# Altium PCB dc_cdi_pcb_recovery.PcbDoc (part 1 of 2)
Units mm, origin at the board's own origin, x right, y up, seen from the top; angles counter-clockwise.
Board outline 152.4 x 101.6 mm, 2 copper layers (Top Layer, Bottom Layer); 123 components, 81 nets, 537 pads, 0 vias.
Unrouted connection lines stored in the file: 280.
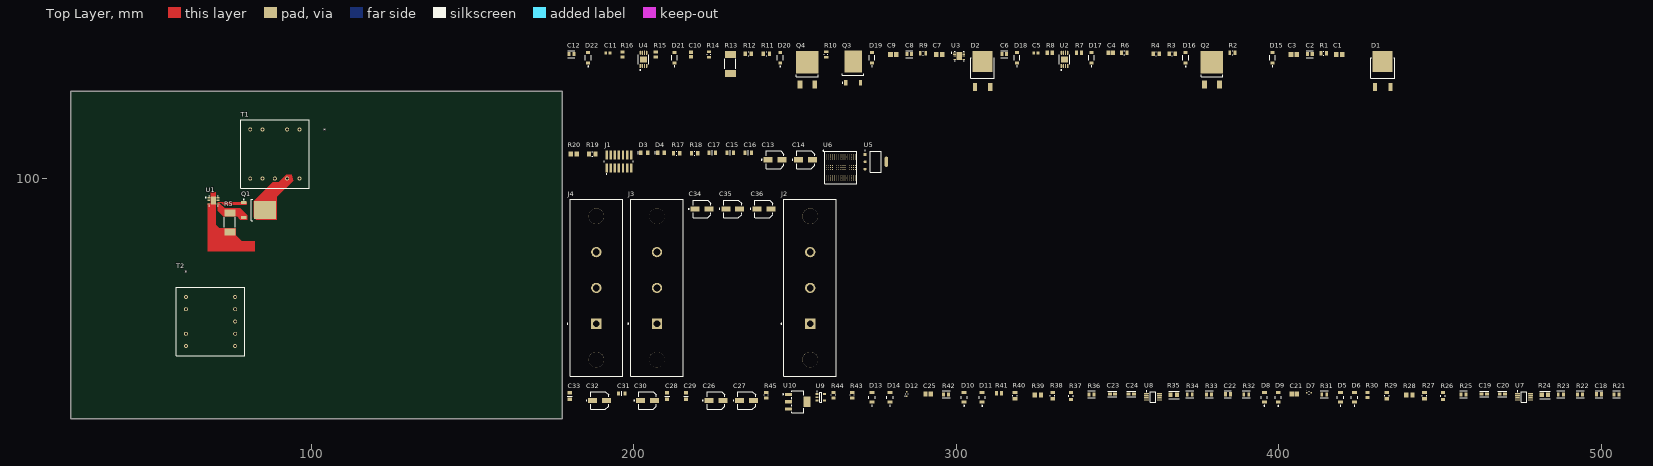
[diagram p0: Top Layer view]
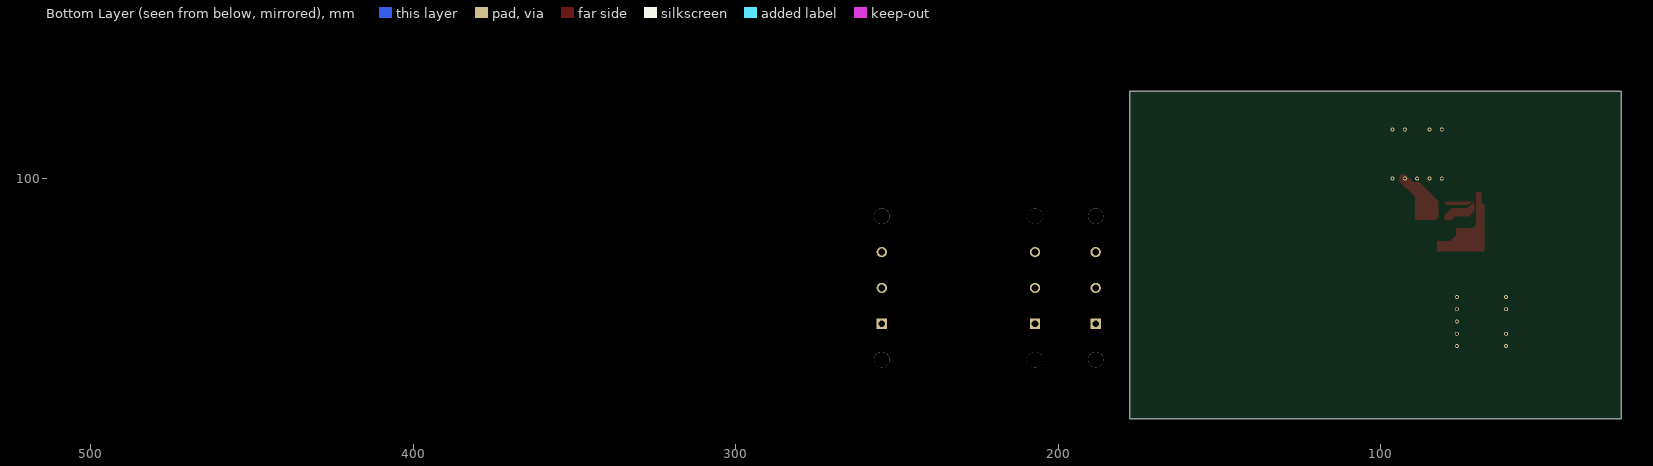
[diagram p1: Bottom Layer view, seen from below]

## Layer stack, top to bottom
Top Solder: solder mask 0.0102, Solder Resist, Dk 3.5
Top Layer: signal copper 0.0356
Dielectric 1: dielectric 0.32, FR-4, Dk 4.8
Bottom Layer: signal copper 0.0356
Bottom Solder: solder mask 0.0102, Solder Resist, Dk 3.5

## Board outline
25.4,25.4 177.8,25.4 177.8,127 25.4,127

## Design rules (kind name [scope] priority, off if disabled: settings)
Clearance Clearance_2 [InNamedPolygon('q3_1')] p1: gap=0 ignorepadtopadclearanceinfootprint=FALSE
Clearance Clearance_1 [InNamedPolygon('q3_1')] p2: gap=0 ignorepadtopadclearanceinfootprint=FALSE
Clearance [All] p3: gap=0.254 ignorepadtopadclearanceinfootprint=FALSE
PolygonConnect [All] p1: connectstyle=Relief reliefconductorwidth=0.254 reliefentries=4 polygonreliefangle="90 Angle" airgapwidth=0.254
RoutingVias [All] p1: holewidth=0.711 width=1.27 viastyle="Through Hole" minholewidth=0.711 minwidth=1.27 maxholewidth=0.711 maxwidth=1.27
SolderMaskExpansion [All] p1: expansion=0.102 istentingtop=FALSE
SupplyNets "Schematic Supply Nets_2" [InNet('GND')] p1: voltage=0.000
SupplyNets "Schematic Supply Nets_1" [InNet('+3V3')] p2: voltage=0.000
SupplyNets "Schematic Supply Nets" [InNet('+5')] p3: voltage=0.000
Width [All] p1: maxlimit=0.254 minlimit=0.254 preferedwidth=0.254
30 further rules are at their usual default settings.

## Classes and differential pairs
component class power_side: C1 C2 C3 C4 C5 C6 C7 C8 C9 C10 C11 C12 D1 D2 D15 D16 D17 D18 D19 D20 D21 D22 Q1 Q2 Q3 Q4 R1 R2 R3 R4 R5 R6 R7 R8 R9 R10 R11 R12 R13 R14 R15 R16 T1 T2 U1 U2 U3 U4
component class logic: C13 C14 C15 C16 C17 D3 D4 J1 R17 R18 R19 R20 U5 U6
component class input_output: C34 C35 C36 J2 J3 J4
component class input_filter: C18 C19 C20 C21 C22 C23 C24 C25 C26 C27 C28 C29 C30 C31 C32 C33 D5 D6 D7 D8 D9 D10 D11 D12 D13 D14 R21 R22 R23 R24 R25 R26 R27 R28 R29 R30 R31 R32 R33 R34 R35 R36 R37 R38 R39 R40 R41 R42 R43 R44 R45 U7 U8 U9 U10

## Components (designator, comment, footprint, x,y, rotation, side; value= is the part's Value field where it differs from the comment)
C1 "GRM21BR61C475KA88L" CAPC2013X135X45LL10T25 418.719,138.43 r0 top
C2 "C0805C224K1RACTU" FP-C0805C-DN-MFG 409.575,138.557 r0 top value="0.22 μF"
C3 "4.7uF 400V" CAPC2013X145X50ML20T25 404.622,138.43 r0 top
C4 "C0805C105K3RACTU" CAPC2013X140X50LL20T25 347.853,138.938 r0 top
C5 "GRM1885C1H101JA01D" CAPC1608X90X35NL10T15 324.612,138.938 r0 top
C6 "C0805C103K2RACTU" FP-C0805C-DN-MFG 314.833,138.557 r0 top value="10,000 pF"
C7 "GRM21BR61C475KA88L" CAPC2013X135X45LL10T25 294.64,138.43 r0 top
C8 "C0805C224K1RACTU" FP-C0805C-DN-MFG 285.369,138.557 r0 top value="0.22 μF"
C9 "4.7uF 400V" CAPC2013X145X50ML20T25 280.416,138.43 r0 top
C10 "C0805C105K3RACTU" CAPC2013X140X50LL20T25 217.678,138.43 r90 top
C11 "GRM1885C1H101JA01D" CAPC1608X90X35NL10T15 191.897,138.938 r0 top
C12 "C0805C103K2RACTU" FP-C0805C-DN-MFG 180.594,138.557 r0 top value="10,000 pF"
C13 "EEE1VA100SR" FP-SC-MFG 243.713,105.791 r0 top
C14 "EEE1VA100SR" FP-SC-MFG 253.238,105.791 r0 top
C15 "08055G104ZAT2A" FP-0805-L_2_01_0_2-W_1_25-MFG 229.87,107.95 r0 top
C16 "08055G104ZAT2A" FP-0805-L_2_01_0_2-W_1_25-MFG 235.458,107.95 r0 top
C17 "08055G104ZAT2A" FP-0805-L_2_01_0_2-W_1_25-MFG 224.282,107.95 r0 top
C18 "C0805C822G2GACTU" FP-C0805C-DN-MFG 499.237,33.02 r0 top value="8,200 pF"
C19 "GRM188R60J106ME47D" FP-GRM188-0_1-e0_2_0_55-IPC_A 463.677,33.147 r0 top
C20 "GRM188R60J106ME47D" FP-GRM188-0_1-e0_2_0_55-IPC_A 469.265,33.147 r0 top
C21 "08051A220J4T2A" CAPC2013X140X50NL20T25 404.749,33.147 r0 top
C22 "C0805C822G2GACTU" FP-C0805C-DN-MFG 384.175,33.02 r0 top value="8,200 pF"
C23 "GRM188R60J106ME47D" FP-GRM188-0_1-e0_2_0_55-IPC_A 348.361,33.147 r0 top
C24 "GRM188R60J106ME47D" FP-GRM188-0_1-e0_2_0_55-IPC_A 354.203,33.147 r0 top
C25 "08051A220J4T2A" CAPC2013X140X50NL20T25 291.211,33.147 r0 top
C26 "EEE1VA100SR" FP-SC-MFG 225.425,31.115 r0 top
C27 "EEE1VA100SR" FP-SC-MFG 234.95,31.115 r0 top
C28 "08055G104ZAT2A" FP-0805-L_2_01_0_2-W_1_25-MFG 210.312,32.512 r90 top
C29 "08055G104ZAT2A" FP-0805-L_2_01_0_2-W_1_25-MFG 216.154,32.512 r90 top
C30 "EEE1VA100SR" FP-SC-MFG 204.216,31.115 r0 top
C31 "08055G104ZAT2A" FP-0805-L_2_01_0_2-W_1_25-MFG 196.215,33.274 r0 top
C32 "EEE1VA100SR" FP-SC-MFG 189.357,31.115 r0 top
C33 "08055G104ZAT2A" FP-0805-L_2_01_0_2-W_1_25-MFG 180.086,32.512 r90 top
C34 "EEEFK1C470UR" FP-FKC-MFG 221.107,90.551 r0 top
C35 "EEEFK1C470UR" FP-FKC-MFG 230.632,90.551 r0 top
C36 "EEEFK1C470UR" FP-FKC-MFG 240.284,90.551 r0 top
D1 "C3D03060E" FP-TO-252-2_v2-MFG 432.181,134.239 r0 top
D2 "C3D03060E" FP-TO-252-2_v2-MFG 308.102,134.239 r0 top
D3 "150080SS75000" WL-SMCW_0805_150080xx75000 203.2,107.95 r0 top
D4 "150080SS75000" WL-SMCW_0805_150080xx75000 208.407,107.95 r0 top
D5 "1N5819HW1-7-F" FP-SOD123F_Type_B-MFG 419.1,32.131 r90 top value=30pF
D6 "1N5819HW1-7-F" FP-SOD123F_Type_B-MFG 423.418,32.131 r90 top value=30pF
D7 "MM5Z2V4ST1G" ONSC-SOD-523-2-502-01_V 409.321,33.528 r0 top
D8 "1N5819HW1-7-F" FP-SOD123F_Type_B-MFG 395.478,32.131 r90 top value=30pF
D9 "1N5819HW1-7-F" FP-SOD123F_Type_B-MFG 399.796,32.131 r90 top value=30pF
D10 "1N5819HW1-7-F" FP-SOD123F_Type_B-MFG 302.387,32.131 r90 top value=30pF
D11 "1N5819HW1-7-F" FP-SOD123F_Type_B-MFG 307.975,32.131 r90 top value=30pF
D12 "MM5Z2V4ST1G" ONSC-SOD-523-2-502-01_V 284.607,33.147 r90 top
D13 "1N5819HW1-7-F" FP-SOD123F_Type_B-MFG 273.812,32.131 r90 top value=30pF
D14 "1N5819HW1-7-F" FP-SOD123F_Type_B-MFG 279.4,32.131 r90 top value=30pF
D15 "MBR0540" FP-425-04-MFG 398.018,137.414 r90 top
D16 "MBR0540" FP-425-04-MFG 371.094,137.414 r90 top
D17 "MBR0540" FP-425-04-MFG 341.884,137.414 r90 top
D18 "MBR0540" FP-425-04-MFG 318.77,137.414 r90 top
D19 "MBR0540" FP-425-04-MFG 273.812,137.414 r90 top
D20 "MBR0540" FP-425-04-MFG 245.364,137.414 r90 top
D21 "MBR0540" FP-425-04-MFG 212.598,137.414 r90 top
D22 "MBR0540" FP-425-04-MFG 185.801,137.414 r90 top
J1 "FTSH-107-01-L-DV-K" FP-FTSH-107-01-L-DV-K-MFG 195.326,105.283 r0 top
J2 "38740-6103" FP-38740-6103-MFG 254.635,66.04 r90 top
J3 "38740-6103" FP-38740-6103-MFG 207.137,66.04 r90 top
J4 "38740-6103" FP-38740-6103-MFG 188.341,66.04 r90 top
Q1 "IPD035N06L3 G" INF-PG-TO252-3-11_A_L 83.594,90.174 r0 top
Q2 "IPD600N25N3" FP-PG-TO252-3-MFG 379.222,133.731 r0 top
Q3 "IPD035N06L3 G" INF-PG-TO252-3-11_A_L 267.97,134.239 r90 top
Q4 "IPD600N25N3" FP-PG-TO252-3-MFG 253.746,133.731 r0 top
R1 "CRCW0805470KFKEA" FP-CRCW0805-e3-IPC_C 413.893,138.811 r0 top
R2 "CRCW0805820KFKEA" RESC2013X50X30LL20T20 385.572,138.938 r0 top
R3 "CRCW08054K70FKEA" FP-CRCW0805-e3-IPC_B 366.903,138.684 r0 top
R4 "CRCW080556K0FKEA" FP-CRCW0805-e3-IPC_B 361.95,138.684 r0 top
R5 "CSRF2512FT15L0" FP-CSRF2512-MFG 74.676,86.36 r90 top
R6 "CRCW0805820KFKEA" RESC2013X50X30LL20T20 352.044,138.938 r0 top
R7 "ERJ6ENF1203V" RESC2013X70X40LL20T20 337.947,138.938 r0 top
R8 "ERA6AEB183V" RESC2013X60X40LL20T25 328.93,138.938 r0 top
R9 "CRCW0805470KFKEA" FP-CRCW0805-e3-IPC_C 289.687,138.811 r0 top
R10 "CRCW0805820KFKEA" RESC2013X50X30LL20T20 259.588,138.43 r90 top
R11 "CRCW08054K70FKEA" FP-CRCW0805-e3-IPC_B 241.046,138.684 r0 top
R12 "CRCW080556K0FKEA" FP-CRCW0805-e3-IPC_B 235.458,138.684 r0 top
R13 "CSRF2512FT15L0" FP-CSRF2512-MFG 229.87,135.509 r90 top
R14 "CRCW0805820KFKEA" RESC2013X50X30LL20T20 223.266,138.43 r90 top
R15 "ERJ6ENF1203V" RESC2013X70X40LL20T20 206.756,138.43 r90 top
R16 "ERA6AEB183V" RESC2013X60X40LL20T25 196.469,138.43 r90 top
R17 "CRCW0805510RFKEA" FP-CRCW0805-e3-IPC_B 213.233,107.823 r0 top
R18 "CRCW0805510RFKEA" FP-CRCW0805-e3-IPC_B 218.821,107.823 r0 top
R19 "RC0805JR-0710KL" RESC2013X60X35ML10T20 187.071,107.569 r0 top
R20 "ERA6AEB101V" RESC2013X60X40ML20T25 181.356,107.569 r0 top
R21 "MCR10EZPJ824" FP-MCR10-IPC_C 504.698,33.02 r0 top
R22 "RMCF0805JT150K" FP-RMCF0805-IPC_C 493.395,33.02 r0 top
R23 "MCR10EZHJ225" FP-MCR10-IPC_C 487.426,33.02 r0 top
R24 "RC2012J683CS" FP-RC2012-IPC_A 482.473,32.893 r0 top
R25 "MCR10EZHJ225" FP-MCR10-IPC_C 457.2,33.02 r0 top
R26 "RT0805DRE0712KL" FP-RT0805-MFG 450.85,32.512 r90 top value=12KΩ
R27 "CRCW080522K0FKEA" Vishay_CRCW0805-e3_MFG 445.135,32.639 r90 top
R28 "ERJ-6GEYJ101V" RESC2013X70X40ML20T20 440.436,32.893 r0 top
R29 "CRCW080510M0FKEB" FP-CRCW0805-e3-MFG 433.451,32.639 r90 top
R30 "ERJ-6GEYJ103V" RESC2013X70X40LL20T20 427.482,32.893 r90 top
R31 "MCR10EZHJ225" FP-MCR10-IPC_C 414.02,33.02 r0 top
R32 "MCR10EZPJ824" FP-MCR10-IPC_C 389.89,33.02 r0 top
R33 "RMCF0805JT150K" FP-RMCF0805-IPC_C 378.333,33.02 r0 top
R34 "MCR10EZHJ225" FP-MCR10-IPC_C 372.364,33.02 r0 top
R35 "RC2012J683CS" FP-RC2012-IPC_A 367.411,32.893 r0 top
R36 "MCR10EZHJ225" FP-MCR10-IPC_C 341.884,33.02 r0 top
R37 "RT0805DRE0712KL" FP-RT0805-MFG 335.534,32.512 r90 top value=12KΩ
R38 "CRCW080522K0FKEA" Vishay_CRCW0805-e3_MFG 329.819,32.639 r90 top
R39 "ERJ-6GEYJ101V" RESC2013X70X40ML20T20 325.247,32.893 r0 top
R40 "CRCW080510M0FKEB" FP-CRCW0805-e3-MFG 318.135,32.639 r90 top
R41 "ERJ-6GEYJ103V" RESC2013X70X40LL20T20 313.182,33.401 r0 top
R42 "MCR10EZHJ225" FP-MCR10-IPC_C 296.799,33.02 r0 top
R43 "CRCW080510K0JNEA" FP-CRCW0805-e3-IPC_C 267.716,32.766 r90 top
R44 "CRCW080510K0JNEA" FP-CRCW0805-e3-IPC_C 261.874,32.766 r90 top
R45 "CRCW080510K0JNEA" FP-CRCW0805-e3-IPC_C 241.046,32.766 r90 top
T1 "74087" T_DIP09_74087_21X21_MYR 96.266,115.189 r270 top
T2 "74087" T_DIP09_74087_21X21_MYR 61.087,63.246 r0 top
U1 "LT3758EDD#PBF" FP-DD-10-05-08-1699-IPC_B 69.596,93.091 r0 top
U2 "ADP3654ARHZ-RL" FP-RH-8-1-IPC_C 333.502,136.906 r90 top
U3 "LT3758EDD#PBF" FP-DD-10-05-08-1699-IPC_B 300.863,137.922 r0 top
U4 "ADP3654ARHZ-RL" FP-RH-8-1-IPC_C 202.946,136.906 r90 top
U5 "AMS1117-3.3" FP-AMS1117-IPC_C 274.955,105.156 r0 top
U6 "STM32F427IIH6" STM-UFBGA176+25 264.16,103.378 r0 top
U7 "ADA4051-2ARMZ" ADI-RM-8_L 475.996,32.258 r0 top
U8 "ADA4051-2ARMZ" ADI-RM-8_L 360.934,32.258 r0 top
U9 "AD8031ARTZ-REEL7" ADI-RJ-5_L 257.937,32.131 r0 top
U10 "LM7805MP/NOPB" FP-DCY0004A-MFG 250.825,30.734 r0 top

## Footprints (in the part's own frame and the unit in brackets; to place one, negate y for a bottom-side part, rotate by r counter-clockwise, add the part's x,y. Pads: shape width x height; smd on the part's side, far side on the other; paste and mask are expansions set on the pad)
ADI-RJ-5_L [mm] "SOT-23, 5-Leads, Body 2.9x1.6mm, Pitch 0.95mm, IPC High Density"
  rect 0.9x0.6 smd: 1(-1.2,0.95) 2(-1.2,0) 3(-1.2,-0.95) 4(1.2,-0.95) 5(1.2,0.95)
  silkscreen extent -1.32,-1.5 0.35,1.92, body extent -0.85,-1.5 0.85,1.5, height 1.45
ADI-RM-8_L [mm] "SOP, 8-Leads, Body 3x3mm, Pitch 0.65mm, IPC High Density"
  oval 1.5x0.45 smd: 1(-2.025,0.975) 2(-2.025,0.325) 3(-2.025,-0.325) 4(-2.025,-0.975) 5(2.025,-0.975) 6(2.025,-0.325) 7(2.025,0.325) 8(2.025,0.975)
  silkscreen extent -2.15,-1.6 0.87,1.87, body extent -1.6,-1.6 1.6,1.6, height 1.1
CAPC1608X90X35NL10T15 [mm] "Chip Capacitor, 2-Leads, Body 1.60x0.80mm, IPC Medium Density"
  rect 0.85x0.95 smd: 1(-0.675,0) 2(0.675,0)
  body extent -0.85,-0.45 0.85,0.45, height 0.9
CAPC2013X135X45LL10T25 [mm] "Chip Capacitor, 2-Leads, Body 2.10x1.35mm, IPC High Density"
  rect 1.4x1.5 smd: 1(-0.95,0) 2(0.95,0)
  body extent -1.05,-0.67 1.05,0.67, height 1.35
CAPC2013X140X50LL20T25 [mm] "Chip Capacitor, 2-Leads, Body 2.00x1.25mm, IPC High Density"
  rect 1.1x1.35 smd: 1(-0.7,0) 2(0.7,0)
  body extent -1.1,-0.72 1.1,0.72, height 1.4
CAPC2013X140X50NL20T25 [mm] "Chip Capacitor, 2-Leads, Body 2.00x1.25mm, IPC Medium Density"
  rect 1.3x1.45 smd: 1(-0.8,0) 2(0.8,0)
  body extent -1.1,-0.72 1.1,0.72, height 1.4
CAPC2013X145X50ML20T25 [mm] "Chip Capacitor, 2-Leads, Body 2.00x1.25mm, IPC Low Density"
  rect 1.5x1.55 smd: 1(-0.9,0) 2(0.9,0)
  body extent -1.1,-0.72 1.1,0.72, height 1.45
FP-425-04-MFG [mil]
  rect 36x48 smd paste+0 mask+0: 1(-64.5,0) 2(64.5,0)
  silkscreen extent -110,-35 32,35, body extent -86,-39 86,39, height 10
FP-0805-L_2_01_0_2-W_1_25-MFG [mm]
  rect 1x1.25 smd paste+0 mask+0: 1(-1,0) 2(1,0)
  silkscreen extent 0,-0.72 0,0.72, body extent -1.6,-0.82 1.6,0.82, height 0.25
FP-38740-6103-MFG [mm]
  rect 3.2x3.2 hole 2.1 paste-2539.97 mask+0: 1(-11.115,0)
  round 3.2 hole 2.1 paste-2539.97 mask+0: 2(-0.005,0) 3(11.105,0)
  round 4.83 hole 4.83 unplated paste-2539.97 mask+0: ""(-22.22,0) ""(22.22,0)
  silkscreen extent -27.45,-8.15 27.45,9.05, body extent -27.55,-8.25 27.55,8.25, height 0.25
FP-AMS1117-IPC_C [mm]
  rect 1.004x0.872 smd paste+0 mask+0: 1(-3.295,2.29)
  rrect100% 1.004x0.872 smd paste+0 mask+0: 2(-3.295,0) 3(-3.295,-2.29)
  rrect87% 1.004x3.182 smd paste+0 mask+0: 4(3.295,0)
  silkscreen extent -3.42,-3.25 1.75,3.62, body extent -3.9,-3.35 3.9,3.35, height 0.25
FP-C0805C-DN-MFG [mm]
  rect 0.95x1.35 smd paste+0 mask+0: 1(-0.75,0) 2(0.75,0)
  silkscreen extent -1.1,-1.07 1.1,1.07, body extent -1.4,-0.85 1.4,0.85, height 0.25
FP-CRCW0805-e3-IPC_B [mm]
  rect 1.007x1.408 smd paste+0 mask+0: 1(-0.951,0) 2(0.951,0)
  silkscreen extent -0.07,-0.63 0.07,0.63, body extent -1.7,-0.95 1.7,0.95, height 0.25
FP-CRCW0805-e3-IPC_C [mil]
  rect 31.75x51.5 smd paste+0 mask+0: 1(-33.5,0) 2(33.5,0)
  silkscreen extent -3,-25 3,25, body extent -53,-31 53,31, height 10
FP-CRCW0805-e3-MFG [mm]
  rect 0.95x1.45 smd paste+0 mask+0: 1(-0.975,0) 2(0.975,0)
  silkscreen extent -0.13,-0.7 0.13,0.7, body extent -1.55,-0.82 1.55,0.82, height 0.25
FP-CSRF2512-MFG [mm]
  rect 2.1x3.4 smd paste+0 mask+0: 1(-2.95,0) 2(2.95,0)
  silkscreen extent -1.53,-1.73 1.53,1.73, body extent -4.1,-1.83 4.1,1.83, height 0.25
FP-DCY0004A-MFG [mm]
  rect 2.15x0.95 smd paste+0 mask+0: 1(-2.9,2.3) 2(-2.9,0) 3(-2.9,-2.3)
  rect 2.15x3.25 smd paste+0 mask+0: 4(2.9,0)
  silkscreen extent -4.7,-3.35 1.85,3.35, body extent -4.08,-3.45 4.08,3.45, height 0.25
FP-DD-10-05-08-1699-IPC_B [mm]
  rect 0.881x0.242 smd paste+0 mask+0: 1(-1.416,1)
  rrect100% 0.881x0.242 smd paste+0 mask+0: 2(-1.416,0.5) 3(-1.416,0) 4(-1.416,-0.5) 5(-1.416,-1) 6(1.416,-1) 7(1.416,-0.5) 8(1.416,0) 9(1.416,0.5) 10(1.416,1)
  rect 1.65x2.48 smd paste-1000 mask+0: 11(0,0)
  silkscreen extent -2.53,-1.5 1.5,1.5, body extent -2.11,-1.75 2.11,1.75, height 0.25
FP-FKC-MFG [mm]
  rect 2.8x1.6 smd paste+0 mask+0: 1(-2.15,0) 2(2.15,0)
  silkscreen extent -4.25,-2.75 2.76,2.75, body extent -3.8,-3 3.8,3, height 0.25
FP-FTSH-107-01-L-DV-K-MFG [mm]
  rect 0.74x2.79 smd paste+0 mask+0: 1(-3.81,-2.035) 2(-3.81,2.035) 3(-2.54,-2.035) 4(-2.54,2.035) 5(-1.27,-2.035) 6(-1.27,2.035) 7(0,-2.035) 8(0,2.035) 9(1.27,-2.035) 10(1.27,2.035) 11(2.54,-2.035) 12(2.54,2.035) 13(3.81,-2.035) 14(3.81,2.035)
  silkscreen extent -4.51,-4.04 4.51,0.27, body extent -4.61,-3.53 4.61,3.53, height 0.25
FP-GRM188-0_1-e0_2_0_55-IPC_A [mm]
  rect 1.208x1.012 smd paste+0 mask+0: 1(-0.802,0) 2(0.802,0)
  silkscreen extent -1.41,-0.91 1.41,0.91, body extent -1.91,-1.01 1.91,1.01, height 0.25
FP-MCR10-IPC_C [mm]
  rect 0.858x1.262 smd paste+0 mask+0: 1(-0.777,0) 2(0.777,0)
  silkscreen extent -1.21,-1.07 1.21,1.07, body extent -1.31,-0.77 1.31,0.77, height 0.25
FP-PG-TO252-3-MFG [mm]
  rect 1.5x2.5 smd paste+0 mask+0: 1(-2.3,-4.575) 3(2.3,-4.575)
  rect 7x7 smd paste+0 mask+0: 4(0,2.325)
  silkscreen extent -3.36,-2.28 3.36,-1.55, body extent -3.6,-5.92 3.6,5.92, height 0.25
FP-RC2012-IPC_A [mm]
  rect 1.305x1.508 smd paste+0 mask+0: 1(-1.001,0) 2(1.001,0)
  silkscreen extent -1.65,-1.15 1.65,1.15, body extent -2.15,-1.25 2.15,1.25, height 0.25
FP-RH-8-1-IPC_C [mm]
  rect 1.257x0.436 smd paste+0 mask+0: 1(-2.051,0.975)
  rrect100% 1.257x0.436 smd paste+0 mask+0: 2(-2.051,0.325) 3(-2.051,-0.325) 4(-2.051,-0.975) 5(2.051,-0.975) 6(2.051,-0.325) 7(2.051,0.325) 8(2.051,0.975)
  rect 1.83x2.26 smd paste-1000 mask+0: 9(0,0)
  silkscreen extent -3.38,-1.6 1.5,1.6, body extent -2.78,-1.6 2.78,1.6, height 0.25
FP-RMCF0805-IPC_C [mm]
  rect 0.955x1.262 smd paste+0 mask+0: 1(-0.776,0) 2(0.776,0)
  silkscreen extent -1.25,-1.07 1.25,1.07, body extent -1.35,-0.77 1.35,0.77, height 0.25
FP-RT0805-MFG [mm]
  rect 0.9x1.2 smd paste+0 mask+0: 1(-1.05,0) 2(1.05,0)
  silkscreen extent -0.23,-0.67 0.23,0.67, body extent -1.6,-0.77 1.6,0.77, height 0.25
FP-SC-MFG [mm]
  rect 2.8x1.6 smd paste+0 mask+0: 1(-2.15,0) 2(2.15,0)
  silkscreen extent -4.22,-2.75 2.75,2.75, body extent -3.8,-3 3.8,3, height 0.25
FP-SOD123F_Type_B-MFG [mm]
  rect 1x1.5 smd paste+0 mask+0: 1(-1.45,0) 2(1.45,0)
  silkscreen extent -2.77,-0.95 0.38,0.95, body extent -2.05,-1.05 2.05,1.05, height 0.25
FP-TO-252-2_v2-MFG [mm]
  rect 1.3x2.4 smd paste+0 mask+0: 1(-2.39,-5.908) 2(2.39,-5.908)
  rect 6.2x6.5 smd paste+0 mask+0: 3(0,2.042)
  silkscreen extent -3.67,-3.12 3.67,3.12, body extent -3.77,-7.21 3.77,5.39, height 0.25
INF-PG-TO252-3-11_A_L [mm] "DPAK, 3-Leads, Body 6.57x6.1mm, Pitch 2.29mm, IPC High Density"
  rect 1.7x0.95 smd: 1(-4.6,2.29) 3(-4.6,-2.29)
  rect 6.8x5.5 smd: 2(2,0)
  silkscreen extent -4.72,-3.35 -1.8,3.44, body extent -2.2,-3.37 4.02,3.37, height 2.41
ONSC-SOD-523-2-502-01_V [mm] "SOD, 2-Leads, Body 1.2x0.8mm"
  rect 0.48x0.4 smd: 1(-0.66,0) 2(0.66,0)
  silkscreen extent -0.75,-0.4 0.07,0.65, body extent -0.6,-0.4 0.6,0.4, height 0.7
RESC2013X50X30LL20T20 [mm] "Chip Resistor, 2-Leads, Body 2.00x1.25mm, IPC High Density"
  rect 0.85x1.35 smd: 1(-0.825,0) 2(0.825,0)
  silkscreen extent -0.1,-0.58 0.1,0.58, body extent -1.1,-0.72 1.1,0.72, height 0.5
RESC2013X60X35ML10T20 [mm] "Chip Resistor, 2-Leads, Body 2.1x1.35mm, IPC Low Density"
  rect 1.2x1.45 smd: 1(-1,0) 2(1,0)
  silkscreen extent -0.1,-0.63 0.1,0.63, body extent -1.05,-0.68 1.05,0.67, height 0.6
RESC2013X60X40LL20T25 [mm] "Chip Resistor, 2-Leads, Body 2.00x1.25mm, IPC High Density"
  rect 1x1.35 smd: 1(-0.75,0) 2(0.75,0)
  body extent -1.1,-0.72 1.1,0.72, height 0.6
RESC2013X60X40ML20T25 [mm] "Chip Resistor, 2-Leads, Body 2.00x1.25mm, IPC Low Density"
  rect 1.4x1.55 smd: 1(-0.95,0) 2(0.95,0)
  body extent -1.1,-0.72 1.1,0.72, height 0.6
RESC2013X70X40LL20T20 [mm] "Chip Resistor, 2-Leads, Body 2.00x1.25mm, IPC High Density"
  rect 0.95x1.35 smd: 1(-0.775,0) 2(0.775,0)
  body extent -1.1,-0.72 1.1,0.72, height 0.7
RESC2013X70X40ML20T20 [mm] "Chip Resistor, 2-Leads, Body 2.00x1.25mm, IPC Low Density"
  rect 1.35x1.55 smd: 1(-0.975,0) 2(0.975,0)
  body extent -1.1,-0.72 1.1,0.72, height 0.7
STM-UFBGA176+25 [mm] "BGA, 201-Balls, Body 10x10mm, Pitch 0.65mm"
  round 0.2 smd: A1(-4.55,4.55) A2(-3.9,4.55) A3(-3.25,4.55) A4(-2.6,4.55) A5(-1.95,4.55) A6(-1.3,4.55) A7(-0.65,4.55) A8(0,4.55) A9(0.65,4.55) A10(1.3,4.55) A11(1.95,4.55) A12(2.6,4.55) A13(3.25,4.55) A14(3.9,4.55) A15(4.55,4.55) B1(-4.55,3.9) B2(-3.9,3.9) B3(-3.25,3.9) B4(-2.6,3.9) B5(-1.95,3.9) B6(-1.3,3.9) B7(-0.65,3.9) B8(0,3.9) B9(0.65,3.9) B10(1.3,3.9) B11(1.95,3.9) B12(2.6,3.9) B13(3.25,3.9) B14(3.9,3.9) B15(4.55,3.9) C1(-4.55,3.25) C2(-3.9,3.25) C3(-3.25,3.25) C4(-2.6,3.25) C5(-1.95,3.25) C6(-1.3,3.25) C7(-0.65,3.25) C8(0,3.25) C9(0.65,3.25) C10(1.3,3.25) C11(1.95,3.25) C12(2.6,3.25) C13(3.25,3.25) C14(3.9,3.25) C15(4.55,3.25) D1(-4.55,2.6) D2(-3.9,2.6) D3(-3.25,2.6) D4(-2.6,2.6) D5(-1.95,2.6) D6(-1.3,2.6) D7(-0.65,2.6) D8(0,2.6) D9(0.65,2.6) D10(1.3,2.6) D11(1.95,2.6) D12(2.6,2.6) D13(3.25,2.6) D14(3.9,2.6) D15(4.55,2.6) E1(-4.55,1.95) E2(-3.9,1.95) E3(-3.25,1.95) E4(-2.6,1.95) E12(2.6,1.95) E13(3.25,1.95) E14(3.9,1.95) E15(4.55,1.95) F1(-4.55,1.3) F2(-3.9,1.3) F3(-3.25,1.3) F4(-2.6,1.3) F6(-1.3,1.3) F7(-0.65,1.3) F8(0,1.3) F9(0.65,1.3) F10(1.3,1.3) F12(2.6,1.3) F13(3.25,1.3) F14(3.9,1.3) F15(4.55,1.3) G1(-4.55,0.65) G2(-3.9,0.65) G3(-3.25,0.65) G4(-2.6,0.65) G6(-1.3,0.65) G7(-0.65,0.65) G8(0,0.65) G9(0.65,0.65) G10(1.3,0.65) G12(2.6,0.65) G13(3.25,0.65) G14(3.9,0.65) G15(4.55,0.65) H1(-4.55,0) H2(-3.9,0) H3(-3.25,0) H4(-2.6,0) H6(-1.3,0) H7(-0.65,0) H8(0,0) H9(0.65,0) H10(1.3,0) H12(2.6,0) H13(3.25,0) H14(3.9,0) H15(4.55,0) J1(-4.55,-0.65) J2(-3.9,-0.65) J3(-3.25,-0.65) J4(-2.6,-0.65) J6(-1.3,-0.65) J7(-0.65,-0.65) J8(0,-0.65) J9(0.65,-0.65) J10(1.3,-0.65) J12(2.6,-0.65) J13(3.25,-0.65) J14(3.9,-0.65) J15(4.55,-0.65) K1(-4.55,-1.3) K2(-3.9,-1.3) K3(-3.25,-1.3) K4(-2.6,-1.3) K6(-1.3,-1.3) K7(-0.65,-1.3) K8(0,-1.3) K9(0.65,-1.3) K10(1.3,-1.3) K12(2.6,-1.3) K13(3.25,-1.3) K14(3.9,-1.3) K15(4.55,-1.3) L1(-4.55,-1.95) L2(-3.9,-1.95) L3(-3.25,-1.95) L4(-2.6,-1.95) L12(2.6,-1.95) L13(3.25,-1.95) L14(3.9,-1.95) L15(4.55,-1.95) M1(-4.55,-2.6) M2(-3.9,-2.6) M3(-3.25,-2.6) M4(-2.6,-2.6) M5(-1.95,-2.6) M6(-1.3,-2.6) M7(-0.65,-2.6) M8(0,-2.6) M9(0.65,-2.6) M10(1.3,-2.6) M11(1.95,-2.6) M12(2.6,-2.6) M13(3.25,-2.6) M14(3.9,-2.6) M15(4.55,-2.6) N1(-4.55,-3.25) N2(-3.9,-3.25) N3(-3.25,-3.25) N4(-2.6,-3.25) N5(-1.95,-3.25) N6(-1.3,-3.25) N7(-0.65,-3.25) N8(0,-3.25) N9(0.65,-3.25) N10(1.3,-3.25) N11(1.95,-3.25) N12(2.6,-3.25) N13(3.25,-3.25) N14(3.9,-3.25) N15(4.55,-3.25) P1(-4.55,-3.9) P2(-3.9,-3.9) P3(-3.25,-3.9) P4(-2.6,-3.9) P5(-1.95,-3.9) P6(-1.3,-3.9) P7(-0.65,-3.9) P8(0,-3.9) P9(0.65,-3.9) P10(1.3,-3.9) P11(1.95,-3.9) P12(2.6,-3.9) P13(3.25,-3.9) P14(3.9,-3.9) P15(4.55,-3.9) R1(-4.55,-4.55) R2(-3.9,-4.55) R3(-3.25,-4.55) R4(-2.6,-4.55) R5(-1.95,-4.55) R6(-1.3,-4.55) R7(-0.65,-4.55) R8(0,-4.55) R9(0.65,-4.55) R10(1.3,-4.55) R11(1.95,-4.55) R12(2.6,-4.55) R13(3.25,-4.55) R14(3.9,-4.55) R15(4.55,-4.55)
  silkscreen extent -5.55,-5 5,5.32, body extent -5,-5 5,5, height 0.6
T_DIP09_74087_21X21_MYR [mil]
  round 48 / inner round 60 / far side round 48 hole 28 paste-99999 mask+0: 1(0,0) 2(0,-150) 4(0,-450) 5(0,-600) 6(600,-600) 7(600,-450) 8(600,-300) 9(600,-150) 10(600,0)
  silkscreen extent -119,-719 719,118
Vishay_CRCW0805-e3_MFG [mm]
  rect 0.95x1.45 smd paste+0 mask+0: 1(-0.975,0) 2(0.975,0)
  silkscreen extent -0.13,-0.7 0.13,0.7, body extent -1.55,-0.82 1.55,0.82, height 0.25
WL-SMCW_0805_150080xx75000 [mm] "SMD Mono-color Chip LED, body 2.0x1.25mm"
  rect 1.1x1.3 smd: 1(-1.05,0) 2(1.05,0)
  silkscreen extent -2,-0.6 -1.8,0.6, body extent -1,-0.63 1,0.62, height 0.7

## Part data
C1 C7: library part CMP-1662-00015-2, "Chip Capacitor, 4.7 uF, +/- 10%, 16 V, -55 to 85 degC, 0805 (2012 Metric), RoHS, Tape and Reel", Capacitance="4.7 uF", Case Code (Imperial)=0805, Case Code (Metric)=2012, Max Operating Temperature="85 degC", Min Operating Temperature="-55 degC", Package Quantity=3000, Tolerance=10%, Type (Capacitors)=X5R, Voltage Rating="16 V", Case\/Package=0805, ComponentLink1Description="Manufacturer URL", ComponentLink1URL=http://www.murata.com/, ComponentLink2Description=Datasheet, ComponentLink2URL=http://search.murata.co.jp/Ceramy/image/img/A01X/G101/ENG/GRM21BR61C475KA88-01.pdf, DatasheetVersion=03/2016, Height="1.25 mm", Length="2 mm", Mount="Surface Mount", Mounting Technology="Surface Mount", PackageDescription="2-Pin Surface Mount Device, Body 2 x 1.25 mm", PackageReference=0805, Packaging="Tape and Reel", PartNumber=GRM21BR61C475KA88L, Pins=2, Radiation Hardening=No, REACH SVHC="No SVHC", RoHSCompliant=true, Voltage Rating (DC)="16 V", Width="1.25 mm"
C2 C8: library part CMP-2007-03262-2, "CAP CER 0.22UF 100V 10% X7R 0805", Capacitance="0.22 μF", Manufacturer=KEMET, Package=C0805C-DN, Temperature="-55°C to +125°C", Temperature Characteristic=X7R, Temperature Coefficient=30ppm/°C, Temperature Range High=+125°C, Temperature Range Low=-55°C, Tolerance=0.1, Voltage Rating="100 V", Automotive=No, Category=Cap, ComponentLink2Description=Datasheet, ComponentLink2URL=https://content.kemet.com/datasheets/KEM_C1003_C0G_SMD.pdf, Device Class L1="Passive Components", Device Class L2=Capacitors, Device Class L3="Ceramic Capacitors", Digikey Description="CAP CER 0.22UF 100V 10% X7R 0805", Height=0.88mm, Ipc Land Pattern Name=CAPC200125X78, Lead Free=Yes, Manufacturer Part Number=C0805C224K1RACTU, Material=Ceramic, Mouser Description="0805 C 220nF Ceramic Multilayer Capacitor, 100 V, +125degC, X7R Dielec, +/-10%", Octopart=https://octopart.com/c0805c224k1ractu-kemet-12818106, RoHS=TRUE
C3 C9: library part CMP-1036-04819-2, Manufacturer=Kemet, Part Number=C0805C225K9PACTU
C4 C10: library part CMP-2007-03234-1, Manufacturer=Kemet, Part Number=C0805C105K3RACTU
C5 C11: library part CMP-2006-02595-1, Manufacturer=Murata, Part Number=GRM1885C1H101JA01D
C6 C12: library part CMP-2007-00259-2, "CAP CER 10000PF 200V X7R 0805", Capacitance="10,000 pF", Manufacturer=KEMET, Package=C0805C-DN, Temperature="-55°C to +125°C", Temperature Characteristic=X7R, Temperature Coefficient=30ppm/°C, Temperature Range High=+125°C, Temperature Range Low=-55°C, Tolerance=0.1, Voltage Rating="200 V", Automotive=No, Category=Cap, ComponentLink2Description=Datasheet, ComponentLink2URL=https://content.kemet.com/datasheets/KEM_C1003_C0G_SMD.pdf, Device Class L1="Passive Components", Device Class L2=Capacitors, Device Class L3="Ceramic Capacitors", Digikey Description="CAP CER 10000PF 200V X7R 0805", Height=0.88mm, Ipc Land Pattern Name=CAPC200125X78, Lead Free=Yes, Manufacturer Part Number=C0805C103K2RACTU, Material=Ceramic, Mouser Description="KEMET - C0805C103K2RACTU - CAP, MLCC, X7R, 10NF, 200V, 0805", Octopart=https://octopart.com/c0805c103k2ractu-kemet-9138347, RoHS=TRUE
C13 C14 C26 C27 C30 C32: library part CMP-05427-000087-1, "CAP ALUM 10UF 20% 35V SMD", Capacitance=10uF, Case/Package=Radial, Leakage Current=3uA, Max Operating Temperature=85°C, Min Operating Temperature=-40°C, Package Quantity=1, Ripple Current=30mA, Tolerance=20%, Voltage=35V, Construction=Cylindrical, Contact Plating=Tin, Diameter=5mm, Height=5.4mm, Height - Seated (Max)=0.213inch, Lead Length=2.2mm, Lead Pitch=1.5mm, Length=5.5mm, Life (Hours)=2000Hour, Mount="Surface Mount", Number of Pins=2, Packaging="Tape and Reel", Radiation Hardening=No, REACH SVHC="No SVHC", Ripple Current (AC)=30mA, RoHS Compliant=Yes, Series=S, Termination=SMD/SMT, Voltage Rating=35V, Voltage Rating (DC)=35V, Width=5.3mm
C15 C16 C17 C28 C29 C31 C33: library part CMP-2007-04640-2, "CAP CER 0.1UF 50V Y5V 0805", Capacitance=100nF, Case Code (Imperial)=0805, Case Code (Metric)=2012, Dielectric=Y5V, Max Operating Temperature=85°C, Min Operating Temperature=-30°C, Package Quantity=1, Tolerance=80%, Voltage=50V, Case/Package=0805, Construction=Flat, Depth=1.25mm, Height=0.93mm, Lead Free="Lead Free", Length=2.01mm, Mount="Surface Mount", Number of Pins=2, Packaging="Tape and Reel", Radiation Hardening=No, REACH SVHC="No SVHC", RoHS Compliant=Yes, Series=-, Termination=SMD/SMT, Thickness=0.028inch, Voltage Rating=50V, Voltage Rating (DC)=50V, Width=0.049inch
C18 C22: library part CMP-03020-022490-1, "C0805 8,200 pF C0G 30ppm/°C 2.00% 200 V", Capacitance="8,200 pF", Manufacturer=KEMET, Package=C0805C-DN, Temperature="-55°C to +125°C", Temperature Characteristic=C0G, Temperature Coefficient=30ppm/°C, Temperature Range High=+125°C, Temperature Range Low=-55°C, Tolerance=0.02, Voltage Rating="200 V", Automotive=No, Category=Cap, ComponentLink2Description=Datasheet, ComponentLink2URL=https://content.kemet.com/datasheets/KEM_C1003_C0G_SMD.pdf, Device Class L1="Passive Components", Device Class L2=Capacitors, Device Class L3="Ceramic Capacitors", Height=0.88mm, Ipc Land Pattern Name=CAPC200125X78, Lead Free=Yes, Manufacturer Part Number=C0805C822G2GACTU, Material=Ceramic, Mouser Description="Multilayer Ceramic Capacitors MLCC - SMD/SMT 200volts 8.2nF 2% C0G", Octopart=https://octopart.com/c0805c822g2gactu-kemet-88375202, RoHS=TRUE
C19 C20 C23 C24: library part CMP-2006-02792-2, "Chip Multilayer Ceramic Capacitors for General Purpose, 0603, 10uF, X5R, 15%, 20%, 6.3V", Capacitance=10uF, Case Code (Imperial)=0603, Case Code (Metric)=1608, Dielectric=X5R, Max Operating Temperature=85°C, Min Operating Temperature=-55°C, Package Quantity=4000, Tolerance=20%, Voltage=6.3V, Case/Package=0603, Depth=0.8mm, Height=0.8mm, Lead Free="Lead Free", Length=1.6mm, Material=Ceramic, Mount="Surface Mount", Packaging="Tape and Reel", Radiation Hardening=No, REACH SVHC="No SVHC", Termination=SMD/SMT, Thickness=0.035inch, Voltage Rating=6.3V, Voltage Rating (DC)=6.3V, Width=0.031inch
C21 C25: library part CMP-2007-04538-1, Manufacturer="AVX Interconnect / Elco", Part Number=08051A220J4T2A
C34 C35 C36: library part CMP-05427-002132-1, "CAP ALUM 47UF 20% 16V SMD", Capacitance=47uF, Case/Package=Radial, Dielectric Material=Aluminium, ESR (Equivalent Series Resistance)=700mR, Leakage Current=3uA, Max Operating Temperature=105°C, Min Operating Temperature=-55°C, Package Quantity=1000, Ratings=AEC-Q200, Ripple Current=160mA, Tolerance=20%, Voltage=10V, Voltage Rating=16V, Construction=Cylindrical, Contact Plating=Tin, Diameter=5mm, Height=5.8mm, Height - Seated (Max)=0.228inch, Impedance=700mR, Lead Free="Lead Free", Length=5.8mm, Life (Hours)=2000Hour, Material=Aluminium, Mount="Surface Mount", Number of Pins=2, Packaging="Tape and Reel", Radiation Hardening=No, Reach SVHC Compliant=Yes, Ripple Current (AC)=160mA, RoHS Compliant=Yes, Series=FK, Termination=SMD/SMT, Voltage Rating (DC)=16V, Width=6.5mm
D1 D2: library part CMP-240925-000041-3, "DIODE SCHOTTKY 600V 3A TO252-2", Average Rectified Current=11A, Case/Package=TO-252, Forward Current=3A, Forward Voltage=1.7V, Max Forward Surge Current (Ifsm)=100A, Max Operating Temperature=175°C, Max Power Dissipation=53W, Max Repetitive Reverse Voltage (Vrrm)=600V, Max Reverse Current=100uA, Max Reverse Leakage Current=50uA, Min Operating Temperature=-55°C, Package Quantity=75, Element Configuration=Single, Height=2.388mm, Length=7.34mm, Max Reverse Voltage (DC)=600V, Max Surge Current=100A, Mount="Surface Mount", Number of Pins=2, Packaging=Rail/Tube, Peak Non-Repetitive Surge Current=100A, Radiation Hardening=No, Reverse Recovery Time=0ns, RoHS Compliant=Yes, Series=Z-Rec®, Termination="Through Hole", Width=7.518mm
D3 D4: library part CMP-1426-00010-4, "Led, Red, 630 Nm, 1.9 V, 30 Ma, 60 Mcd Rohs Compliant: Yes", Case Code (Imperial)=0805, Case Code (Metric)=2012, Color=Red, Forward Current=100mA, Forward Voltage=1.9V, Max Junction Temperature (Tj)=95°C, Max Operating Temperature=85°C, Max Reverse Voltage (DC)=5V, Min Operating Temperature=-40°C, Power Dissipation=72mW, Test Current=20mA, Case/Package=0805, Dominant Wavelength=630nm, Height=700µm, Length=2mm, Lens Style="Clear, Rectangular", Luminous Intensity=60mcd, Mount="Surface Mount", Packaging="Tape and Reel", Peak Wavelength=645nm, REACH SVHC=Unknown, Reverse Voltage=5V, RoHS=Compliant, Viewing Angle=140°, Wavelength=630nm, Width=1.25mm
D5 D6 D8 D9 D10 D11 D13 D14: library part CMP-12791-000028-1, "DIODE SBR 40V 1A SOD123F", Capacitance=30pF, Forward Current=1A, Manufacturer="Diodes Inc.", Max Junction Temp=+125°C, Max Repetitive Reverse Voltage=40V, Max Surge Forward Current=30A, Package="SOD123F (Type B)", Peak Reverse Current=0.5mA, Temperature="-55°C to +125°C", Temperature Range Low=-55°C, Automotive=No, Category=Diode, ComponentLink2Description=Datasheet, ComponentLink2URL=https://www.diodes.com/assets/Datasheets/1N5819HW1.pdf, Device Class L1="Discrete Semiconductors", Device Class L2=Diodes, Device Class L3="Rectifier Diodes", Digikey Description="DIODE SBR 40V 1A SOD123F", Footprint Url=https://www.diodes.com/assets/Package-Files/SOD123F%20(Type%20B).pdf, Height=1.15mm, Ipc Land Pattern Name=SOD350180X98-2, Lead Free=Yes, Manufacturer Part Number=1N5819HW1-7-F, Mouser Description="Schottky Diodes & Rectifiers 1A SBR 40Vrrm 0.51Vf 0.5mA 28Vrms", Octopart=https://octopart.com/1n5819hw1-7-f-diodes+inc.-67250096, Reverse Voltage=40V, RoHS=TRUE, Temperature Range High=+125°C
D7 D12: library part CMP-1060-00754-1, "Zener Voltage Regulator, 500 mW, 2-Pin SOD-523, Pb-Free, Tape and Reel", Manufacturer="On Semiconductor", ComponentLink1Description="Manufacturer URL", ComponentLink1URL=http://www.onsemi.com/, ComponentLink2Description=Datasheet, ComponentLink2URL=http://www.onsemi.cn/pub_link/Collateral/MM5Z2V4ST1-D.PDF, ComponentLink3Description="Package Specification", ComponentLink3URL=http://www.onsemi.com/pub_link/Collateral/502-01.PDF, DatasheetVersion="Rev. 9", Mounting Technology="Surface Mount", P Max (W)=0.5, PackageDescription="2-Pin SOD, Body 1.2 x 0.8 mm", PackageReference=SOD-523-2-502-01, PackageVersion="Rev. E, 09/2010", Packing="Tape and Reel", PartNumber=MM5Z2V4ST1G, RoHS=Pb-Free
D15 D16 D17 D18 D19 D20 D21 D22: library part CMP-2000-05114-2, "DIODE SCHOTTKY 40V 500MA SOD123", Average Rectified Current=500mA, Current Rating=500A, Forward Voltage=620mV, Max Forward Surge Current (Ifsm)=5.5A, Max Operating Temperature=125°C, Max Repetitive Reverse Voltage (Vrrm)=40V, Max Reverse Leakage Current=20uA, Min Operating Temperature=-65°C, Package Quantity=3000, Power Dissipation=400mW, Contact Plating=Tin, Element Configuration=Single, Forward Current=500mA, Height=1.03mm, Lead Free="Lead Free", Length=2.7mm, Max Reverse Voltage (DC)=40V, Max Surge Current=5.5A, Mount="Surface Mount", Number of Pins=2, Output Current=500mA, Packaging="Tape and Reel", Peak Non-Repetitive Surge Current=5.5A, Peak Reverse Current=20uA, Polarity=Standard, Radiation Hardening=No, REACH SVHC="No SVHC", Voltage Rating (DC)=40V, Weight=0.03g, Width=1.6mm
J1: library part CMP-02766-001412-1, "CONN HEADER SMD 14POS 1.27MM", Housing Color=Black, Max Operating Temperature=125°C, Min Operating Temperature=-55°C, Contact Material=Bronze, Contact Plating=Gold, Depth=5.84mm, Gender=Male, Housing Material=Polymer, Lead Free="Lead Free", Length=8.89mm, Number of Contacts=14, Number of Rows=2, Orientation=Straight, Packaging=Rail/Tube, Pitch=1.27mm, Radiation Hardening=No, RoHS Compliant=Yes, Termination=Solder
J2 J3 J4: library part CMP-00257-08326119-1, "38740-6103 11.11mm Pitch Beau PCB Fixed Mount Barrier Terminal Strip, Low Profile, 300V, 3 Circuits", Color=Black, Current Rating=15A, Manufacturer Lifecycle Status=ACTIVE, Max Operating Temperature=130°C, Min Operating Temperature=-40°C, Voltage Rating=300V, Contact Material="Brass, Tin", Contact Plating=Tin, Country of Origin=US, ELV=Compliant, Height=14.478mm, Length=54.61mm, Lifecycle Status=Production, Material=Brass, NexarPartId=8326119, Number of Circuits=3, Number of Contacts=3, Number of Poles=3, Number of Positions=3, Number of Rows=1, Orientation=Horizontal, Pitch=11.11mm, Plating=Tin, RoHS=Compliant, Termination=Screw, Width=16.002mm, Wire Gauge (Max)=10AWG, Wire Gauge (Min)=24AWG
Q1 Q3: library part CMP-1091-00172-1, "N-Channel OptiMOS 3 Power-Transistor, 60 V VDS, 90 A ID, -55 to 175 degC, PG-TO252-3-11, Reel, Green", Manufacturer=Infineon, ComponentLink1Description="Manufacturer URL", ComponentLink1URL=http://www.infineon.com/, ComponentLink2Description=Datasheet, ComponentLink2URL=http://www.infineon.com/dgdl/IPD035N06L3_Rev2.3.pdf?folderId=db3a304313b8b5a60113cee8763b02d7&fileId=db3a30431b3e89eb011b4558ed7f7d14, ComponentLink3Description="Package Specification", ComponentLink3URL=http://www.infineon.com/dgdl/IPD160N04L_rev1.0.pdf?folderId=db3a3043163797a6011643468e7505a4&fileId=db3a3043163797a60116436401cf05cf, DatasheetVersion="Rev. 2.3", Green=TRUE, Halogen-free=TRUE, ID (max)="90Â A", IDpuls (max)="360Â A", Mounting Technology="Surface Mount", PackageDescription="3-Pin Plastic (Green) Transistor Single Outline Package, 6.57 x 6.1 mm Body, 2.29 mm Pitch", PackageReference=PG-TO252-3-11, PackageVersion="Rev. 02, 03/2007", Packing=Reel, PartNumber="IPD035N06L3 G", Polarity=N, Ptot (max)="167Â W", QG="59Â nC", RDS (on) (max)="3.5Â mOhm", RDS (on) (max) (@4.5V)="5.5Â mOhm", Rth="0.9Â K/W", RthJA (max)="62 K/W", RthJC (max)="0.9Â K/W", VDS (max)="60Â V", VGS(th) (max)="2.2Â V", VGS(th) (min)="1.2Â V"
Q2 Q4: library part CMP-32901-000143-1, "MOSFET N-CH 30V 161A DPAK", Continuous Drain Current=161A, Drain To Source Breakdown Voltage=30V, Drain To Source Resistance=3.2mΩ, Gate To Source Voltage=20V, Input Capacitace At Vds="4380pF @ 15V", Manufacturer=Infineon, Manufacturer Part Number=IRLR7843TRPBF, Max Forward Diode Voltage=1V, Max Junction Temp=+175°C, Package=PG-TO252-3, Power Dissipation=140W, Pulse Drain Current=620A, Temperature="-55°C to +175°C", Temperature Range Low=-55°C, Automotive=No, Category=Trans, ComponentLink2Description=Datasheet, ComponentLink2URL=https://www.infineon.com/dgdl/irlr7843pbf.pdf?fileId=5546d462533600a40153566de53526d8, Depletion Mode=False, Device Class L1="Discrete Semiconductors", Device Class L2=Transistors, Device Class L3=MOSFETs, Digikey Description="MOSFET N-CH 30V 161A DPAK", Drain To Source Voltage=30V, Footprint Url=https://www.infineon.com/cms/en/product/packages/PG-TO252/PG-TO252-3-901/, Gate Charge At Vgs="34nC @ 4.5V", Height=2.52mm, Lead Free=Yes, Number Of Channels=1, Number Of N Channels=1, Octopart=https://octopart.com/irlr7843trpbf-infineon-65875062, Reverse Recovery Charge=36nC, Reverse Recovery Time=39ns, RoHS=TRUE, Rthja Max=50°C/W, Temperature Range High=+175°C, Threshold Vgs Max=2.3V, Threshold Vgs Min=1.4V, Turn Off Delay Time=34ns, Turn On Delay Time=25ns
R1 R9: library part CMP-2001-03930-2, "RES Thick Film, 470kΩ, 1%, 0.125W, 100ppm/°C, 0805", Case Code (Imperial)=0805, Case Code (Metric)=2012, Max Operating Temperature=155°C, Max Power Dissipation=125mW, Min Operating Temperature=-55°C, Package Quantity=10, Resistance=470kR, Temperature Coefficient=100ppm/°C, Tolerance=1%, Voltage Rating=150V, Case/Package=0805, Composition="Thick Film", Contact Plating=Tin, Depth=1.25mm, Features="Automotive AEC-Q200", Height=0.45mm, Lead Free="Lead Free", Length=2mm, Military Standard=Not, Number of Pins=2, Number of Terminations=2, Packaging="Tape and Reel", Power Rating=125mW, Radiation Hardening=No, Termination=SMD/SMT, Voltage Rating (DC)=150V, Weight=0.000194oz, Width=0.049inch
R2 R6 R10 R14: library part CMP-2001-04129-1, Manufacturer="Vishay Dale", Part Number=CRCW0805820KFKEA
R3 R11: library part CMP-2100-03615-2, "RES Thick Film, 4.7kΩ, 1%, 0.125W, 100ppm/°C, 0805", Case Code (Imperial)=0805, Case Code (Metric)=2012, Max Operating Temperature=155°C, Max Power Dissipation=125mW, Min Operating Temperature=-55°C, Package Quantity=10, Resistance=4.7kR, Temperature Coefficient=100ppm/°C, Tolerance=1%, Voltage Rating=150V, Case/Package=0805, Composition="Thick Film", Contact Plating=Tin, Depth=1.25mm, Features="Automotive AEC-Q200", Height=0.45mm, Lead Free="Lead Free", Length=2mm, Military Standard=Not, Number of Terminations=2, Packaging="Tape and Reel", Power Rating=125mW, Radiation Hardening=No, Termination=SMD/SMT, Voltage Rating (DC)=150V, Weight=0.000194oz, Width=1.25mm
R4 R12: library part CMP-2001-04015-2, "RES Thick Film, 56kΩ, 1%, 0.125W, 100ppm/°C, 0805", Case Code (Imperial)=0805, Case Code (Metric)=2012, Max Operating Temperature=155°C, Max Power Dissipation=125mW, Min Operating Temperature=-55°C, Package Quantity=10, Resistance=56kR, Temperature Coefficient=100ppm/°C, Tolerance=1%, Voltage Rating=150V, Case/Package=0805, Composition="Thick Film", Contact Plating=Tin, Depth=1.25mm, Features="Automotive AEC-Q200", Height=0.45mm, Lead Free="Lead Free", Length=2mm, Military Standard=Not, Mount="Surface Mount", Number of Pins=2, Number of Terminations=2, Packaging="Tape and Reel", Power Rating=125mW, Radiation Hardening=No, Termination=SMD/SMT, Voltage Rating (DC)=150V, Weight=0.000194oz, Width=1.25mm
R5 R13: library part CMP-26527-004567-1, "Foil on Ceramic Current Sensing Chip Resistor 15mΩ ±1% 2W 2512 AEC Qualified", Case/Package=2512, Max Operating Temperature=170°C, Max Power Dissipation=2W, Min Operating Temperature=-55°C, Package Quantity=2000, Resistance=15mR, Resistor Type="Metal Foil", Temperature Coefficient=50ppm/°C, Tolerance=1%, Contact Plating=Tin, Features="Moisture Resistant", Height=0.047inch, Lead Free="Lead Free", Length=0.252inch, Mount="Surface Mount", Number of Terminations=2, Packaging="Tape and Reel", Power Rating=2W, Radiation Hardening=No, RoHS Compliant=Yes, Series=CSRF, Width=0.126inch
R7 R15: library part CMP-2001-00514-1, Manufacturer=Panasonic, Part Number=ERJ6ENF1203V
R8 R16: library part CMP-2001-00606-1, Manufacturer=Panasonic, Part Number=ERA6AEB183V
R17 R18: library part CMP-2001-03989-2, "RES Thick Film, 510Ω, 1%, 0.125W, 100ppm/°C, 0805", Case Code (Imperial)=0805, Case Code (Metric)=2012, Max Operating Temperature=155°C, Max Power Dissipation=125mW, Min Operating Temperature=-55°C, Package Quantity=10, Resistance=510R, Temperature Coefficient=100ppm/°C, Tolerance=1%, Voltage Rating=150V, Case/Package=0805, Composition="Thick Film", Contact Plating=Tin, Depth=1.25mm, Features="Automotive AEC-Q200", Height=0.45mm, Lead Free="Lead Free", Length=2mm, Military Standard=Not, Mount="Surface Mount", Number of Terminations=2, Packaging="Tape and Reel", Power Rating=125mW, Radiation Hardening=No, Termination=SMD/SMT, Voltage Rating (DC)=150V, Weight=0.000194oz, Width=0.049inch
R19: library part CMP-2000-05025-1, "Chip Resistor, 10 KOhm, +/- 5%, 0.125 W, -55 to 155 degC, 0805 (2012 Metric), RoHS, Tape and Reel", Manufacturer=Yageo, Package Description="2-Pin Surface Mounted Device, Body 2 x 1.25 mm", Package Reference=805, Power Rating=250mW, Resistance=10kohm, Resistance Tolerance=±5%, Resistor Case Style=0805[2012Metric], Resistor Element Type=ThickFilm, Temperature Coefficient=±100ppm/degC, Voltage Rating=150V, Automotive Qualification Standard=-, Datasheet URL=http://www.yageo.ru/pdf/RC0805.pdf, Datasheet Version="REV. 2, 09/2004", Manufacturer URL=http://www.yageo.com/, MSL=MSL1-Unlimited, Packaging=CutTape, Product Range=RCSeries, SVHC=ToBeAdvised
R20: library part CMP-2001-00580-1, Manufacturer=Panasonic, Part Number=ERA6AEB101V
R21 R32: library part CMP-08839-014008-1, "Thick Film Chip Resistor, 0805, 820kΩ, 5%, 200ppm/°C, 0.125W, 150V", Case Code (Imperial)=0805, Case Code (Metric)=2012, Max Operating Temperature=155°C, Max Power Dissipation=125mW, Min Operating Temperature=-55°C, Package Quantity=1, Resistance=820kR, Resistor Type="Thick Film", Temperature Coefficient=200ppm/°C, Tolerance=5%, Voltage Rating (DC)=150V, Case/Package=0805, Features="Automotive AEC-Q200", Height=0.024inch, Lead Free="Lead Free", Length=0.079inch, Number of Terminations=2, Packaging="Tape and Reel", RoHS Compliant=Yes, Series=MCR10, Width=0.049inch
R22 R33: library part CMP-26527-000664-1, "150kΩ ±5% 0.125W 0805 Thick Film Chip Resistor AEC-Q200 compliant", Case Code (Imperial)=0805, Case Code (Metric)=2012, Max Operating Temperature=155°C, Max Power Dissipation=125mW, Min Operating Temperature=-55°C, Resistance=150kR, Resistor Type="Thick Film", Temperature Coefficient=200ppm/°C, Tolerance=5%, Case/Package=0805, Construction=Rectangular, Contact Plating=Tin, Depth=1.25mm, Features="Automotive AEC-Q200", Height=0.026inch, Lead Free="Lead Free", Length=0.079inch, Military Standard=Not, Mount="Surface Mount", Number of Terminations=2, Packaging="Tape and Reel", Power Rating=125mW, Radiation Hardening=No, RoHS Compliant=Yes, Series=RMCF, Size Code=0805, Width=0.049inch
R23 R25 R31 R34 R36 R42: library part CMP-08839-008650-1, "Thick Film Chip Resistor, 0805, 2.2MΩ, 5%, 200ppm/°C, 0.125W, 150V", Case/Package=0805, Max Operating Temperature=155°C, Max Power Dissipation=125mW, Min Operating Temperature=-55°C, Resistance=2.2MR, Resistor Type="Thick Film", Temperature Coefficient=200ppm/°C, Tolerance=5%, Voltage Rating (DC)=150V, Contact Plating=Tin, Lead Free="Lead Free", Mount="Surface Mount", Number of Terminations=2, Packaging="Tape and Reel", Power Rating=125mW, RoHS Compliant=Yes, Series=MCR, Size Code=0805
R24 R35: library part CMP-13261-002689-1, "Res Thick Film 0805 68kΩ 5% 0.125W ±100ppm/°C Molded SMD T/R", Case Code (Imperial)=0805, Case Code (Metric)=2012, Max Operating Temperature=155°C, Max Power Dissipation=125mW, Min Operating Temperature=-55°C, Resistance=68kR, Temperature Coefficient=100ppm/°C, Tolerance=5%, Voltage Rating (DC)=150V, Case/Package=0805, Composition="Thick Film", Contact Plating=Tin, Features="Moisture Resistant", Height=0.024inch, Lead Free="Lead Free", Length=0.079inch, Number of Terminations=2, Packaging="Tape and Reel", Power Rating=125mW, Radiation Hardening=No, Width=0.049inch
R26 R37: library part CMP-2001-01786-2, "RES SMD 12K OHM 0.5% 1/8W 0805", Manufacturer=Yageo, Package=RT0805, Power Rating=0.125W, Resistance=12KΩ, Temperature="-55°C to +155°C", Temperature Coefficient="50 ppm/°C", Temperature Range High=+155°C, Temperature Range Low=-55°C, Tolerance=0.01, Voltage Rating=150V, Automotive=No, Category=Res, ComponentLink2Description=Datasheet, ComponentLink2URL=http://www.yageo.com/documents/recent/PYu-RT_1-to-0.01_RoHS_L_9.pdf, Composition="Thin Film", Device Class L1="Passive Components", Device Class L2=Resistors, Device Class L3="Chip SMD Resistors", Digikey Description="RES SMD 12K OHM 0.5% 1/8W 0805", Footprint Url=http://www.yageo.com/exep/pages/download/literatures/PYu-R_Mount_10.pdf, Height=0.6mm, Ipc Land Pattern Name=RESC200125X50, Lead Free=Yes, Manufacturer Part Number=RT0805DRE0712KL, Mouser Description="Thin Film Resistors - SMD 1/8W 12K ohm .5% 50ppm", Octopart=https://octopart.com/rt0805dre0712kl-yageo-1455327, RoHS=TRUE, Series=RT
R27 R38: library part CMP-2001-03688-2, Case Code (Imperial)=0805, Case Code (Metric)=2012, Manufacturer Package Identifier=CRCW0805-e3, Max Operating Temperature=155°C, Max Power Dissipation=125mW, Min Operating Temperature=-55°C, Resistance=22kΩ, Temperature Coefficient=100ppm/°C, Tolerance=1%, Voltage Rating=150V, Case/Package=0805, Composition="Thick Film", Contact Plating=Tin, Depth=1.25mm, Features="Automotive AEC-Q200", Height=450µm, Lead Free="Lead Free", Length=2mm, Military Standard=Not, Mount="Surface Mount", NexarPartId=39823174, Number of Pins=2, Number of Terminations=2, Packaging="Cut Tape (CT)", Power Rating=125mW, Radiation Hardening=No, REACH SVHC=Unknown, RoHS=Compliant, Schedule B="8533210045, 8533210045", Termination=SMD/SMT, Voltage Rating (DC)=150V, Weight=5.499807mg, Width=1.2446mm
R28 R39: library part CMP-1013-00050-2, Manufacturer=Panasonic, Part Number=ERJ-6GEYJ101V
R29 R40: library part CMP-02407-011730-1, "RES Thick Film, 10MΩ, 1%, 0.125W, 100ppm/°C, 0805", Case Code (Imperial)=0805, Case Code (Metric)=2012, Max Operating Temperature=155°C, Max Power Dissipation=125mW, Min Operating Temperature=-55°C, Package Quantity=10000, Resistance=10MR, Resistor Type="Thick Film", Temperature Coefficient=100ppm/°C, Tolerance=1%, Voltage Rating=150V, Case/Package=0805, Features="Automotive AEC-Q200", Height=0.02inch, Lead Free="Lead Free", Length=0.079inch, Number of Terminations=2, Packaging="Tape and Reel", Power Rating=125mW, RoHS Compliant=Yes, Series=CRCW, Termination=SMD/SMT, Weight=0.000194oz, Width=1.25mm
R30 R41: library part CMP-2001-00337-1, Manufacturer=Panasonic, Part Number=ERJ-6GEYJ103V
R43 R44 R45: library part CMP-2001-04910-2, "RES Thick Film, 10kΩ, 5%, 0.125W, 200ppm/°C, 0805", Case Code (Imperial)=0805, Case Code (Metric)=2012, Max Operating Temperature=155°C, Min Operating Temperature=-55°C, Package Quantity=5000, Power Rating=125mW, Resistance=10kR, Temperature Coefficient=200ppm/°C, Tolerance=5%, Voltage Rating=150V, Case/Package=0805, Composition="Thick Film", Contact Plating=Tin, Depth=1.25mm, Height=0.45mm, Lead Free="Lead Free", Length=2mm, Military Standard=Not, Mount="Surface Mount", Packaging="Tape and Reel", Radiation Hardening=No, Termination=SMD/SMT, Voltage Rating (DC)=150V, Weight=0.000194oz, Width=1.25mm
T1 T2: "No Description Available", Mfr_Name=Myrra, RefDes=RefDes, Type=Type
  T1: ComponentLink1Description="New link"
U1 U3: library part CMP-09139-000585-1, "IC REG CTRLR MULT TOPOLOGY 10DFN", Case/Package=DFN, Max Frequency=1MHz, Max Input Voltage=100V, Max Operating Temperature=125°C, Max Output Current=1.2A, Max Output Voltage=12V, Min Input Voltage=5.5V, Min Operating Temperature=-40°C, Package Quantity=121, Height=0.7mm, Length=3mm, Max Supply Voltage=100V, Min Supply Voltage=5.5V, Mount="Surface Mount", Number of Outputs=1, Number of Pins=10, Output Voltage=100V, Packaging=Rail/Tube, REACH SVHC="No SVHC", RoHS Compliant=Yes, Series=-, Switching Frequency=1MHz, Topology=Boost, Width=3mm
U2 U4: library part CMP-09133-000023-1, "IC GATE DRVR LOW-SIDE 8MINISOIC", Case/Package=MSOP, Max Input Voltage=18V, Max Operating Temperature=125°C, Max Output Current=4A, Max Supply Current=3mA, Min Input Voltage=4.5V, Min Operating Temperature=-40°C, Package Quantity=3000, Channel Type=Independent, Fall Time=25ns, Lead Free="Contains Lead", Max Supply Voltage=18V, Min Supply Voltage=4.5V, Mount="Surface Mount", Nominal Supply Current=3mA, Number of Drivers=2, Number of Outputs=2, Number of Pins=8, Output Current=4A, Packaging="Tape and Reel", Propagation Delay=35ns, Rise Time=14ns, RoHS Compliant=Yes, Series=-, Supply Current=3mA, Turn-On Delay Time=35ns
U5: library part CMP-209535-000001-1, "LDO Voltage Regulators 1A, 3.3V", Dropout Voltage=1.1V, Manufacturer="Advanced Monolithic Systems", Max Junction Temp=+125°C, Max Power Dissipation=1.2W, Max Supply Voltage=15V, Nominal Supply Current=5mA, Output Current=1A, Output Voltage=3.3V, Package=AMS1117, Temperature="-40°C to +125°C", Temperature Range Low=-40°C, Automotive=No, Category=IC, ComponentLink2Description=Datasheet, ComponentLink2URL=http://www.advanced-monolithic.com/pdf/ds1117.pdf, Device Class L1="Integrated Circuits (ICs)", Device Class L2="Power Management ICs", Device Class L3="Voltage Regulators - Linear", Height=1.8mm, Ipc Land Pattern Name=SOT229P700X180-4, Lead Free=Yes, Manufacturer Part Number=AMS1117-3.3, Number of Outputs=1, Octopart=https://octopart.com/ams1117-3.3-advanced+monolithic+systems-25899300, Output Type=Fixed, RoHS=TRUE, Standoff Height=0.64mm, Temperature Range High=+125°C